# Altium PCB 16515.PcbDoc (part 2 of 2)
Units mil, origin at the board's own origin, x right, y up, seen from the top; angles counter-clockwise.
Board outline 3543.31 x 2500 mil, 6 copper layers (Top Layer, Layer 1, SIG_1, SIG_2, Layer 2, Bottom Layer), stack 56.912 mil thick; 73 components, 58 nets, 263 pads, 207 vias.
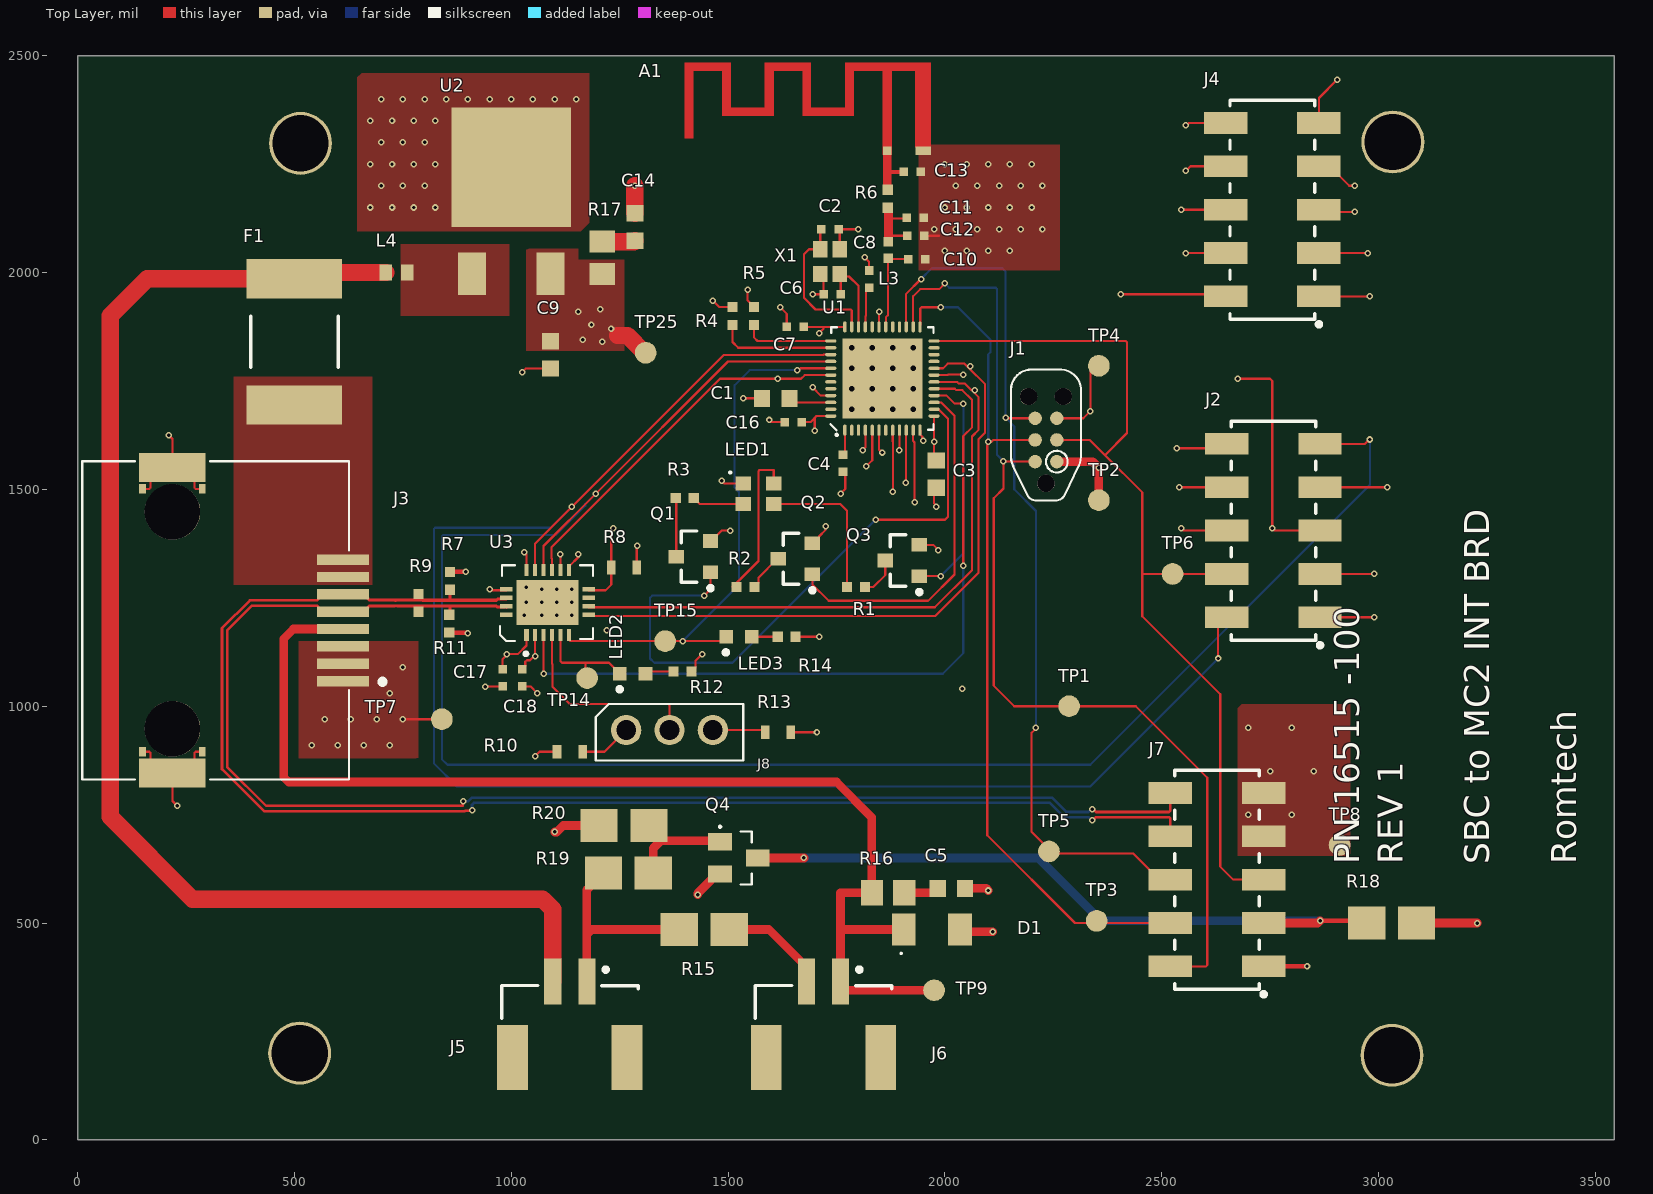
[diagram p0: Top Layer view]

## Part data (continued)
R7: library part Res, "YAGEO - RC0402FR-07620RL - Surface Mount Chip Resistor, Thick Film, RC Series, 620 ohm, 63 mW, 1%, 50 V, 0402 [1005 Metric] RoHS Compliant: Yes", Case Code (Imperial)=0402, Case Code (Metric)=1005, Manufacturer 1=Yageo, Manufacturer Part Number 1=RC0402FR-07620RL, Max Operating Temperature=155°C, Max Power Dissipation=63mW, Min Operating Temperature=-55°C, Package Quantity=1, Resistance=620, Resistance Tolerance=1%, Resistor Type="Thick Film", Supplier Part Number 1=311-620LRTR-ND, Temperature Coefficient=100ppm/°C, Voltage Rating=50V, Case/Package=0402, Category="Chip SMD Resistors", ComponentLink1Description=https://datasheet.ciiva.com/16867/pyu-rc0402-51-rohs-l-6-16867429.pdf?src-supplier=Avnet+Europe, ComponentLink1URL=https://datasheet.ciiva.com/16867/pyu-rc0402-51-rohs-l-6-16867429.pdf?src-supplier=Avnet+Europe, ComponentLink2Description=https://datasheet.ciiva.com/2453/pyu-r-int-thick-7-2453670.pdf?src-supplier=Digi-Key, ComponentLink2URL=https://datasheet.ciiva.com/2453/pyu-r-int-thick-7-2453670.pdf?src-supplier=Digi-Key, ComponentLink3Description=https://datasheet.ciiva.com/17066/pyu-rc0402-51-rohs-l-6-r-17066550.pdf?src-supplier=Future+Electronics, ComponentLink3URL=https://datasheet.ciiva.com/17066/pyu-rc0402-51-rohs-l-6-r-17066550.pdf?src-supplier=Future+Electronics, ComponentLink4Description=https://datasheet.ciiva.com/2453/pyu-r-int-thick-7-2453672.pdf?src-supplier=Digi-Key, ComponentLink4URL=https://datasheet.ciiva.com/2453/pyu-r-int-thick-7-2453672.pdf?src-supplier=Digi-Key, ComponentLink5Description=https://datasheet.ciiva.com/7850/1018594-7850062.pdf?src-supplier=Element14, ComponentLink5URL=https://datasheet.ciiva.com/7850/1018594-7850062.pdf?src-supplier=Element14, ComponentLink6Description=https://datasheet.ciiva.com/7850/1018594-7850063.pdf?src-supplier=Element14, ComponentLink6URL=https://datasheet.ciiva.com/7850/1018594-7850063.pdf?src-supplier=Element14, ComponentLink7Description=https://datasheet.ciiva.com/8885/pyu-rc0402-51-rohs-l-6-8885125.pdf?src-supplier=Avnet, ComponentLink7URL=https://datasheet.ciiva.com/8885/pyu-rc0402-51-rohs-l-6-8885125.pdf?src-supplier=Avnet, ComponentLink8Description=https://datasheet.ciiva.com/28388/pyu-rc0402-51-rohs-l-6-28388966.pdf?src-supplier=Avnet+Europe, ComponentLink8URL=https://datasheet.ciiva.com/28388/pyu-rc0402-51-rohs-l-6-28388966.pdf?src-supplier=Avnet+Europe, ComponentLink9Description=https://datasheet.ciiva.com/2453/pyu-r-int-thick-7-2453671.pdf?src-supplier=Digi-Key, ComponentLink9URL=https://datasheet.ciiva.com/2453/pyu-r-int-thick-7-2453671.pdf?src-supplier=Digi-Key, Construction=Rectangular, Contact Plating=Tin,Matte, Depth=0.5mm, Features="Moisture Resistant", Height=0.016inch, Lead Free="Lead Free", Length=1mm, Military Standard=Not, Number of Terminations=2, Packaging="Tape and Reel", Power Rating=63mW, Pricing 1="10000=0.00178, 30000=0.00156, 50000=0.00143, 100000=0.00140 (USD)", REACH SVHC=Unknown, RoHS=Yes, RoHS Compliant=Yes, Series=RC, Size Code=0402, Stock 1=180000, Supplier 1=Digi-Key, Termination=SMD/SMT, Tolerance=1%, Voltage Rating (DC)=50V, Width=0.5mm
R8 R10 R13: library part Res, "RES SMD 10K OHM 1% 1/4W 0603", Manufacturer 1="Panasonic Electronic Components", Manufacturer Part Number 1=ERJ-PA3F1002V
R9: library part Res, "Res Thick Film 0402 110 Ohm 1% 0.063W(1/16W) ±100ppm/C Pad SMD Automotive T/R", Case Code (Imperial)=0402, Case Code (Metric)=1005, Manufacturer 1="Stackpole Electronics", Manufacturer Part Number 1=RMCF0402FT110R, Max Operating Temperature=155°C, Max Power Dissipation=63mW, Min Operating Temperature=-55°C, Package Quantity=1, Resistor Type="Thick Film", Supplier Part Number 1=RMCF0402FT110RTR-ND, Temperature Coefficient=100ppm/°C, Tolerance=1%, Case/Package=0402, Category="Chip SMD Resistors", ComponentLink1Description=https://www.seielect.com/Catalog/SEI-RMCF_RMCP.pdf?src-supplier=Avnet, ComponentLink1URL=https://www.seielect.com/Catalog/SEI-RMCF_RMCP.pdf?src-supplier=Avnet, ComponentLink2Description=https://www.seielect.com/Catalog/SEI-RMCF_RMCP.pdf?src-supplier=Digi-Key, ComponentLink2URL=https://www.seielect.com/Catalog/SEI-RMCF_RMCP.pdf?src-supplier=Digi-Key, ComponentLink3Description=https://www.seielect.com/catalog/SEI-Packaging.pdf?src-supplier=Digi-Key, ComponentLink3URL=https://www.seielect.com/catalog/SEI-Packaging.pdf?src-supplier=Digi-Key, Contact Plating=Tin,Matte, Features="Automotive AEC-Q200", Height=0.016inch, Lead Free="Lead Free", Length=0.039inch, Mount="Surface Mount", Number of Terminations=2, Packaging="Tape and Reel", Pricing 1="10000=0.00163, 30000=0.00144, 50000=0.00132, 100000=0.00129 (USD)", Resistance=110R, RoHS=Yes, RoHS Compliant=Yes, Series=RMCF, Stock 1=90000, Supplier 1=Digi-Key, Width=0.02inch
R11: library part Res, "YAGEO - RC0402FR-07620RL - Surface Mount Chip Resistor, Thick Film, RC Series, 620 ohm, 63 mW, 1%, 50 V, 0402 [1005 Metric] RoHS Compliant: Yes", Case Code (Imperial)=0402, Case Code (Metric)=1005, Manufacturer 1=Yageo, Manufacturer Part Number 1=RC0402FR-07620RL, Max Operating Temperature=155°C, Max Power Dissipation=63mW, Min Operating Temperature=-55°C, Package Quantity=1, Resistance Tolerance=1%, Resistor Type="Thick Film", Supplier Part Number 1=311-620LRTR-ND, Temperature Coefficient=100ppm/°C, Voltage Rating=50V, Case/Package=0402, Category="Chip SMD Resistors", ComponentLink1Description=https://datasheet.ciiva.com/16867/pyu-rc0402-51-rohs-l-6-16867429.pdf?src-supplier=Avnet+Europe, ComponentLink1URL=https://datasheet.ciiva.com/16867/pyu-rc0402-51-rohs-l-6-16867429.pdf?src-supplier=Avnet+Europe, ComponentLink2Description=https://datasheet.ciiva.com/2453/pyu-r-int-thick-7-2453670.pdf?src-supplier=Digi-Key, ComponentLink2URL=https://datasheet.ciiva.com/2453/pyu-r-int-thick-7-2453670.pdf?src-supplier=Digi-Key, ComponentLink3Description=https://datasheet.ciiva.com/17066/pyu-rc0402-51-rohs-l-6-r-17066550.pdf?src-supplier=Future+Electronics, ComponentLink3URL=https://datasheet.ciiva.com/17066/pyu-rc0402-51-rohs-l-6-r-17066550.pdf?src-supplier=Future+Electronics, ComponentLink4Description=https://datasheet.ciiva.com/2453/pyu-r-int-thick-7-2453672.pdf?src-supplier=Digi-Key, ComponentLink4URL=https://datasheet.ciiva.com/2453/pyu-r-int-thick-7-2453672.pdf?src-supplier=Digi-Key, ComponentLink5Description=https://datasheet.ciiva.com/7850/1018594-7850062.pdf?src-supplier=Element14, ComponentLink5URL=https://datasheet.ciiva.com/7850/1018594-7850062.pdf?src-supplier=Element14, ComponentLink6Description=https://datasheet.ciiva.com/7850/1018594-7850063.pdf?src-supplier=Element14, ComponentLink6URL=https://datasheet.ciiva.com/7850/1018594-7850063.pdf?src-supplier=Element14, ComponentLink7Description=https://datasheet.ciiva.com/8885/pyu-rc0402-51-rohs-l-6-8885125.pdf?src-supplier=Avnet, ComponentLink7URL=https://datasheet.ciiva.com/8885/pyu-rc0402-51-rohs-l-6-8885125.pdf?src-supplier=Avnet, ComponentLink8Description=https://datasheet.ciiva.com/28388/pyu-rc0402-51-rohs-l-6-28388966.pdf?src-supplier=Avnet+Europe, ComponentLink8URL=https://datasheet.ciiva.com/28388/pyu-rc0402-51-rohs-l-6-28388966.pdf?src-supplier=Avnet+Europe, ComponentLink9Description=https://datasheet.ciiva.com/2453/pyu-r-int-thick-7-2453671.pdf?src-supplier=Digi-Key, ComponentLink9URL=https://datasheet.ciiva.com/2453/pyu-r-int-thick-7-2453671.pdf?src-supplier=Digi-Key, Construction=Rectangular, Contact Plating=Tin,Matte, Depth=0.5mm, Features="Moisture Resistant", Height=0.016inch, Lead Free="Lead Free", Length=1mm, Military Standard=Not, Number of Terminations=2, Packaging="Tape and Reel", Power Rating=63mW, Pricing 1="10000=0.00178, 30000=0.00156, 50000=0.00143, 100000=0.00140 (USD)", REACH SVHC=Unknown, Resistance=620R, RoHS=Yes, RoHS Compliant=Yes, Series=RC, Size Code=0402, Stock 1=180000, Supplier 1=Digi-Key, Termination=SMD/SMT, Tolerance=1%, Voltage Rating (DC)=50V, Width=0.5mm
R15 R18 R19 R20: library part Res, "Resistor", Manufacturer 1="Stackpole Electronics", Manufacturer Part Number 1=RMCF1206FT2K00, Supplier Part Number 1=RMCF1206FT2K00CT-ND, Supplier 1=Digi-Key
R16 R17: library part Res, "Resistor", Manufacturer 1=Panasonic, Manufacturer Part Number 1=ERJ-P06F1001V, Supplier Part Number 1=P16058CT-ND, ComponentLink1Description="New link", Supplier 1=Digi-Key
TP1 TP2 TP3 TP4 TP5 TP6 TP7 TP8 TP9 TP14 TP15 TP25: library part Test, "Test point"
U1: "IC RF TXRX+MCU BLUETOOTH 48QFN", Case/Package=QFN, Current - Receiving=10.4mA, Current - Transmitting=15.2mA, Frequency=2.4GHz, Manufacturer 1="Nordic Semiconductor", Max Operating Temperature=85°C, Min Operating Temperature=-40°C, Supplier Part Number 1=1490-1052-2-ND, ComponentLink1Description=http://www.mouser.com/ds/2/297/nRF52832%20Product%20Brief%20v1.2-890472.pdf?src-supplier=Mouser, ComponentLink1URL=http://www.mouser.com/ds/2/297/nRF52832%20Product%20Brief%20v1.2-890472.pdf?src-supplier=Mouser, ComponentLink2Description=https://www.nordicsemi.com/eng/Products/Bluetooth-Smart-Bluetooth-low-energy/nRF52832?src-supplier=Avnet+Asia, ComponentLink2URL=https://www.nordicsemi.com/eng/Products/Bluetooth-Smart-Bluetooth-low-energy/nRF52832?src-supplier=Avnet+Asia, ComponentLink3Description=http://infocenter.nordicsemi.com/pdf/nRF52832_PB_v1.7.pdf?src-supplier=Digi-Key, ComponentLink3URL=http://infocenter.nordicsemi.com/pdf/nRF52832_PB_v1.7.pdf?src-supplier=Digi-Key, ComponentLink4Description=http://infocenter.nordicsemi.com/pdf/nRF52832_PS_v1.4.pdf?src-supplier=Digi-Key, ComponentLink4URL=http://infocenter.nordicsemi.com/pdf/nRF52832_PS_v1.4.pdf?src-supplier=Digi-Key, Core Architecture=ARM, Data Bus Width=32b, Data Rate=2Mbps, Interface=I2C,SPI,UART, Lead Free="Lead Free", Manufacturer Part Number 1=NRF52832-QFAA-R, Max Frequency=2.4GHz, Memory Size=64KB, Memory Type=FLASH, Mount="Surface Mount", Number of GPIO=32, Number of Pins=48, Packaging="Tape and Reel", Pricing 1="3000=2.59350 (USD)", RAM Size=64Kb, RoHS=Yes, Sensitivity=-96dBm, Stock 1=60000, Supplier 1=Digi-Key
U2: library part Component_1, "Linear Voltage Regulator IC Positive Fixed 1 Output 1A TO-252", Manufacturer 1="Rohm Semiconductor", Manufacturer Partnumber 1=BA033CC0FP-E2
U3: "I2C Slave Device Extender Over Rugged Differential Link 20-QFN", Manufacturer 1="Analog Devices", Supplier Part Number 1=LTC4331CUFD#PBF-ND, Manufacturer Part Number 1=LTC4331CUFD#PBF, Pricing 1="1=6.84000, 10=6.17600, 25=5.88880, 100=4.88340, 250=4.45252, 500=4.16528, 1000=3.79400 (USD)", RoHS=Yes, RoHS Compliant=Yes, Stock 1=282, Supplier 1=Digi-Key
X1: library part FA-12832.0000MF10Z-AJ3, "32MHz ±10ppm Crystal 8pF 60 Ohms 4-SMD, No Lead", Case/Package=SMD/SMT, ESR (Equivalent Series Resistance)=60R, Frequency Stability=10ppm, Load Capacitance=8pF, Manufacturer 1=Epson, Max Operating Temperature=75°C, Min Operating Temperature=-20°C, Supplier Part Number 1=SER4233TR-ND, ComponentLink1Description=https://www5.epsondevice.com/en/information/support/pdf/june_2018_psc_masterbook.pdf?src-supplier=Digi-Key, ComponentLink1URL=https://www5.epsondevice.com/en/information/support/pdf/june_2018_psc_masterbook.pdf?src-supplier=Digi-Key, ComponentLink2Description=https://support.epson.biz/td/api/doc_check.php?dl=brief_FA-128_en.pdf&src-supplier=Digi-Key, ComponentLink2URL=https://support.epson.biz/td/api/doc_check.php?dl=brief_FA-128_en.pdf&src-supplier=Digi-Key, Frequency=32MHz, Frequency Tolerance=10ppm, Height=0.02inch, Lead Free="Lead Free", Length=0.079inch, Manufacturer Part Number 1=FA-12832.0000MF10Z-AJ3, Mount="Surface Mount", Packaging="Tape and Reel", Pricing 1="250=0.36000, 500=0.34200, 750=0.31500, 1250=0.28800, 2500=0.27000, 6250=0.26100, 12500=0.25200 (USD)", RoHS=Yes, Stock 1=6250, Supplier 1=Digi-Key, Width=0.063inch

## Free pads (board coordinates)
  round 145 hole 129.92: 1(512,200) 1(514,2298) 1(3031,195) 1(3033,2301)

## Via types
v1: diameter 15, hole 8, Top Layer to Bottom Layer, 191 vias
v2: diameter 25.98, hole 12.99, Top Layer to Bottom Layer, 16 vias

## Nets (pads, with @x,y where several pads share a name; then routed paths per layer and width w, separated by ;. In a path a pad name is that pad's centre, name@x,y a point inside that pad or via, vN(x,y) a via of type N, cw(c..) or ccw(c..) an arc to the next point about the centre after c; other vN are vias at no path point)
3.3V: C3.1 C7.1 C9.2 C16.1 C17.2 C18.2 J1.1 J4.1 J4.3 J7.1 LED1.1 R7.2 R8.2 R10.1 R12.1 R14.1 R17.2 R18.1 TP2.1 TP25.1 U1.13 U1.36 U1.48 U2.2 U3.1 U3.2 U3.17 | length 1592.1
  Top Layer w5: v1(950,1270) 952.6,1267.4 U3.17@988.7,1267.4 ; C17.2 980,1108.79 990,1118.79 v1(990,1120) 1015,1120 1035,1140 U3.1@1035,1162 ; C18.2 1032.34,1092.34 1032.34,1102.34 1036.02,1106.02 1043.31,1106.02 1052.29,1115 v1(1055,1115) 1054.84,1115.16 1054.84,1161.86 U3.2@1054.7,1162 ; v1(1055,885) 1065,895 R10.1 ; v1(1290,1370) 1289.53,1369.53 R8.2 R8.2@1294.21,1315.31 ; R12.1 1424.98,1089.31 1424.98,1104.98 v1(1440,1120) ; v1(1485,1520) 1491.38,1513.62 LED1.1 ; R14.1 v1(1710,1160) ; C16.1 1690,1655 1700,1665 ; C7.1@1674.68,1874.72 1720,1874.72 ; v1(1700,1635) 1700,1665 ; v1(1710,1860) 1710,1860.58 1720,1870.58 1720,1874.72 ; U1.48 1704.02,1669.02 1700,1665 ; U1.36 1720,1874.72 ; C3.1@1975,1576.5 v1(1975,1610) U1.13 ; J4.1 v1(2980,1945) ; J4.3 v1(2975,2045)
  Top Layer w10: R7.2 894.67,1309.67 v1(895,1310) ; J7.1 v1(2835,400)
  Top Layer w20: J1.1 2341,1564 v1(2355,1550) TP2.1 ; R18.1 v1(3227.48,500)
  Top Layer w40: 1245,1855 1267.29,1855 1307.29,1815 TP25.1
  other v1: 1210,1840 1165,1845 1230,1870 1185,1880 1155,1910 1205,1915
24V_OUT_TABLET: F1.2 J5.2 L4.1 | length 3107.8
  Top Layer w40: L4.1 514.33,2000 F1.2 160.67,1985.67 75,1900 75,745 265,555 1072.2,555 1095.63,531.57 J5.2
/ALERT: R8.1 U1.12 U3.10 | length 1297
  Top Layer w5: U3.10@1178.66,1267.4 1217.6,1267.4 1230.47,1280.27 R8.1 1230.47,1405.47 v1(1235,1410) ; U1.12 1943.07,1635.99 1943.07,1626.35 1947.78,1621.64 1947.78,1613.68 v1(1949.69,1611.77)
  SIG_1 w5: v1(1235,1410) 1263.28,1410 1565,1711.72 1565,1761.21 1613.79,1810 1700,1810 1735,1775 1735,1622.93 1737.93,1620 1918.28,1620 1926.51,1611.77 v1(1949.69,1611.77)
AUX_TP0: J4.2 U1.9 | length 1003.1
  Top Layer w5: v1(1895,1590) 1895.28,1590.28 U1.9 ; v1(2405,1950) 2642.52,1950 J4.2
  SIG_2 w5: v1(1895,1590) 1931.77,1626.77 2066.77,1626.77 2130,1690 2130,1780 2300,1950 v1(2405,1950)
AUX_TP1: J4.4 U1.10 | length 1516.3
  Top Layer w5: v1(1910,1515) 1910,1624.62 1910.47,1625.1 1910.47,1635.99 U1.10 ; v1(2555,2045) J4.4
  SIG_2 w5: v1(1910,1515) 1910,1466.21 1976.21,1400 2445,1400 2510,1465 2510,2000 v1(2555,2045)
AUX_TP2: J4.6 U1.11 | length 1569.7
  Top Layer w5: U1.11 1926.77,1611.51 1930,1608.28 v1(1930,1470) ; v1(2545,2145) J4.6
  SIG_2 w5: v1(1930,1470) 1930,1467.43 1973.03,1424.39 2448.18,1424.39 2459.39,1435.61 2459.39,2059.39 v1(2545,2145)
AUX_TP3: J4.8 U1.6 | length 1184.8
  Top Layer w5: U1.6 1848.03,1591.97 v1(1855,1585) ; v1(2555,2235) 2556.21,2235 2566.21,2245 J4.8
  SIG_2 w5: v1(1855,1585) 1906.77,1636.77 2056.77,1636.77 2110,1690 2110,1800 2545,2235 v1(2555,2235)
AUX_TP4: J4.10 U1.4 | length 1393.1
  Top Layer w5: v1(1810,1590) 1816.54,1596.54 U1.4 ; v1(2555,2340) 2557.71,2340 2562.71,2345 J4.10
  SIG_1 w5: v1(1810,1590) 1837.19,1562.81 2019.88,1562.81 2022.81,1565.74 2022.81,1857.81 2505,2340 v1(2555,2340)
AUX_TP5: J2.10 U1.5 | length 1070.6
  Top Layer w5: v1(1818.36,1553.36) 1832.28,1567.28 U1.5 ; v1(2535,1595) 2640.04,1595 J2.10
  SIG_1 w5: v1(1818.36,1553.36) 1821.06,1553.36 1826.61,1547.81 2073.54,1547.81 2191.35,1430 2415,1430 2535,1550 v1(2535,1595)
DEC1: C4.1 U1.1 | length 58.6
  Top Layer w5: C4.1 1769.29,1583.98 U1.1
DEC3: C8.1 U1.33 | length 94.1
  Top Layer w5: U1.33 1816.54,1898.46 1817.66,1899.59 1817.66,1957.97 C8.1
E-STP_STATUS: J4.5 J7.3 Q4.3 R18.2 U1.8 | length 4989.4
  Top Layer w5: U1.8 1879.53,1610.47 1880,1610 v1(1880,1495) ; J4.5 2867.48,2140 v1(2945,2140) ; R18.2@2967.52,505 R18.2
  Top Layer w10: v1(2865,505) R18.2@2967.52,505
  Top Layer w20: Q4.3 v1(1675,650) ; J7.3 2860,500 v1(2865,505)
  SIG_2 w5: v1(1675,650) 1880,855 1880,1475 ; v1(1880,1495) 1880,1475 ; v1(2945,2140) 3090,2140 3215,2015 3215,1560 3100,1445 2545,1445 2485,1385 2346.25,1385 2330.25,1369 2124.75,1369 2108.75,1385 1970,1385 1880,1475
  Bottom Layer w20: v1(1675,650) 2215,650 2360,505 v1(2865,505)
GND: A1.GND C1.1 C2.2 C3.2 C4.2 C5.2 C6.2 C7.2 C8.2 C9.1 C10.1 C11.2 C12.2 C13.2 C14.2 C16.2 C17.1 C18.1 D1.1 J1.5 J3.1 J3.2 J3.3 J3.SH1 J3.SH1_1 J3.SH1_2 J3.SH2 J3.SH2_1 J3.SH2_2 J4.7 J4.9 J7.7 J7.9 Q1.2 Q2.2 Q3.2 Q4.2 R4.2 R5.2 R11.1 R13.1 R20.2 TP4.1 TP7.1 TP8.1 U1.31 U1.45 U1.49 U2.3 U3.11 U3.12 U3.16 U3.EP X1.2 X1.4 | length 2611.7
  Top Layer w5: J3.SH2_2 165.18,894.85 168.11,891.92 168.11,876.74 199.11,845.74 J3.SH2 ; J3.SH1_2 165.18,1501.15 168.11,1504.08 168.11,1519.26 199.11,1550.26 J3.SH1 ; v1(210,1625) 218.7,1616.3 J3.SH1 ; v1(230,770) 218.7,781.3 J3.SH2 ; J3.SH2_1 272.22,894.85 269.3,891.92 269.3,876.74 238.3,845.74 J3.SH2 ; J3.SH1_1 272.22,1501.15 269.3,1504.08 269.3,1519.26 238.3,1550.26 J3.SH1 ; 760,970 TP7.1 ; v1(940,1045) 940.63,1045.63 C17.1 ; C18.1 1044.37,1045.63 v1(1060,1030) ; v1(1025,1770) 1033.5,1778.5 C9.1 ; v1(1030,1355) 1035,1350 U3.16@1035,1313.58 ; v1(1112.6,1350) 1113.8,1348.8 U3.12@1113.8,1313.58 ; U3.11@1133.5,1313.58 1133.5,1322.58 1155,1344.08 v1(1155,1350) ; Q1.2 1461.34,1381.02 1485.31,1405 v1(1505,1405) ; v1(1465,1935) 1479.33,1920.67 R4.2 ; v1(1535,1710) C1.1 ; v1(1545,1960) 1545,1935.67 R5.2 ; v1(1595,1660) 1595,1657.93 1597.93,1655 C16.2 ; v1(1620,1920) 1635.31,1904.69 C7.2 ; R13.1 v1(1705,940) ; Q2.2 1696.34,1376.02 1709.59,1389.27 1709.59,1391.24 1725,1406.65 v1(1725,1415) ; v1(1695,1735) 1713.74,1716.26 U1.45 ; v1(1695,1950) C6.2 1720.31,1988.5 X1.4 ; X1.2 1757.64,2097.05 C2.2 v1(1800,2100) ; v1(1760,1489.69) 1760,1490.9 1770,1500.9 C4.2@1770,1540.31 ; v1(1815,2035) 1825,2025 C8.2 ; U1.31 1848.03,1909.25 v1(1848.78,1910) ; Q3.2 1972.95,1372.05 v1(1985,1360) ; C12.2 1986.13,2085 ; C3.2@1975,1513.5 1975,1467.71 1980,1462.71 v1(1980,1460) ; J1.5 2319,1664 v1(2335,1680) 2335.63,1680.63 2335.63,1779.37 TP4.1@2336.25,1780 ; J4.7 2887.48,2245 2932.48,2200 v1(2945,2200) ; J4.9 2862.48,2402.48 v1(2905,2445)
  Top Layer w10: R11.1 896.99,1169.66 898.65,1168 v1(900,1168)
  Top Layer w20: v1(1100,710) 1105,710 1120,725 R20.2 ; v1(1430,565) 1430,568.78 1473.82,612.6 Q4.2 ; D1.1 2039.96,480 v1(2110,480) ; C5.2 2095,580 v1(2100,575)
  Top Layer w40: C14.2 v1(1285,2200)
  other v1: 2700,750 2800,750 2750,850 2850,850 540,910 600,910 660,910 720,910 2700,950 2800,950 570,970 630,970 690,970 750,970 720,1030 750,1090 1220,1175 1030,1210 1070,1210 1105,1210 1140,1210 1035,1240 1070,1240 1105,1240 1140,1240 1070,1270 1105,1270 1140,1270 1035.06,1273.76 2000,2050 2050,2050 2100,2050 2150,2050 1975,2100 2025,2100 2075,2100 2125,2100 2175,2100 2225,2100 675,2150 725,2150 775,2150 825,2150 2000,2150 2050,2150 2100,2150 2150,2150 2200,2150 700,2200 750,2200 800,2200 2025,2200 2075,2200 2125,2200 2175,2200 2225,2200 675,2250 725,2250 775,2250 825,2250 2000,2250 2050,2250 2100,2250 2150,2250 2200,2250 700,2300 750,2300 800,2300 675,2350 725,2350 775,2350 825,2350 700,2400 750,2400 800,2400 850,2400 900,2400 950,2400 1000,2400 1050,2400 1100,2400 1150,2400
  other v2: 1785.04,1684.76 1832.28,1684.76 1879.53,1684.76 1926.77,1684.76 1785.04,1732.01 1832.28,1732.01 1879.53,1732.01 1926.77,1732.01 1785.04,1779.25 1832.28,1779.25 1879.53,1779.25 1926.77,1779.25 1785.04,1826.5 1832.28,1826.5 1879.53,1826.5 1926.77,1826.5
I2C_EN: J2.7 U1.17 U3.3 | length 3377.6
  Top Layer w5: U3.3@1074.4,1162 1074.4,1075.6 v1(1075,1075) ; U1.17 2022.68,1732.01 2025.78,1728.9 2039.97,1728.9 2062.81,1706.06 2062.81,1643.52 2042.38,1623.09 v1(2042.38,1324.09) ; J2.7 v1(3020,1505)
  SIG_1 w5: v1(2040,1040) 2296.15,1040 2386.15,1130 2645,1130 v1(3020,1505)
  SIG_2 w5: v1(2040,1040) 2041.19,1041.19 2041.19,1322.9 v1(2042.38,1324.09)
  Bottom Layer w5: v1(1075,1075) 1995,1075 2042.38,1122.38 v1(2042.38,1324.09)
I2C_EN_ACC: J2.3 U1.19 | length 1734.1
  Top Layer w5: U1.19 2005.8,1763.5 2007.5,1765.21 2041.51,1765.21 v1(2042.81,1763.9) ; J2.3 v1(2990,1305)
  SIG_1 w5: v1(2042.81,1763.9) 2044.22,1762.5 2275.41,1762.5 2276.41,1761.5 2494,1761.5 2537.5,1805 3010,1805 3065,1750 3065,1380 v1(2990,1305)
I2C_RDY: J2.6 LED3.2 TP15.1 U1.41 U3.6 | length 2970.6
  Top Layer w5: U3.6@1133.5,1162 1133.5,1153 1136.5,1150 1280,1150 v1(1395,1150) 1485.47,1150 LED3.2 ; v1(1660,1775) 1662.71,1775 1667.71,1780 1668.45,1779.25 U1.41 ; v1(2545,1410) 2550,1405 J2.6
  SIG_1 w5: v1(1660,1775) 1600,1775 1595,1770 1595,1688.28 1615,1668.28 1615,1440 1950,1105 2132.43,1105 2437.43,1410 v1(2545,1410)
  Bottom Layer w5: v1(1395,1150) 1525,1280 1525,1494.14 1515,1504.14 1515,1740 1550,1775 v1(1660,1775)
I2C_SCL: J2.1 U1.20 U3.7 | length 3316.7
  Top Layer w5: U3.7@1178.66,1208.3 1978.3,1208.3 2077.38,1307.38 2077.38,1615.66 2092.81,1631.1 2092.81,1742.19 v1@2055,1780 ; U1.20 1995.97,1779.25 2006.72,1790 2045,1790 v1@2055,1780 ; v1(2058.43,1783.43) v1@2055,1780 ; J2.1 v1(2990,1205)
  SIG_1 w5: v1(2058.43,1783.43) 2095,1820 3030,1820 3085,1765 3085,1300 v1(2990,1205)
I2C_SDA: J2.5 U1.18 U3.8 | length 2593.3
  Top Layer w5: U3.8@1178.66,1228 1976.79,1228 2062.38,1313.59 2062.38,1621.87 2077.81,1637.31 2077.81,1712.27 2046.18,1743.9 2031.99,1743.9 2028.14,1747.76 U1.18 ; v1(2675,1755) 2750,1755 2755,1750 v1(2755,1410) 2760,1405 J2.5
  SIG_1 w5: v1(2068.58,1728.58) 2086.5,1746.5 2500.21,1746.5 2508.71,1755 v1(2675,1755)
L_BLUE: Q2.1 U1.15 | length 817.7
  Top Layer w5: Q2.1 1694.37,1280.73 1732.1,1243 1961.28,1243 2022.19,1303.9 2022.19,1669.68 1991.36,1700.51 U1.15
L_GRN: Q3.1 U1.16 | length 546.6
  Top Layer w5: Q3.1@1941.02,1298.98 1940,1298.98 Q3.1 v1(1990,1300) ; U1.16 2003.89,1716.26 2022.38,1697.78 v1(2042.81,1697.78)
  Bottom Layer w5: v1(1990,1300) 2042.81,1352.81 v1(2042.81,1697.78)
L_RED: Q1.1 U1.14 | length 1424.9
  Top Layer w5: v1(1445,1255) 1459.37,1269.37 Q1.1 ; v1(1840,1430) 2000,1430 2007.19,1437.19 2007.19,1662.81 1985.24,1684.76 U1.14
  Bottom Layer w5: v1(1445,1255) 1325,1255 1320,1250 1320,1110 1330,1100 1510,1100 v1(1840,1430)
NetA1_ANT: A1.ANT C13.1 R6.2 | length 130.9
  Top Layer w10: R6.2@1867,2191.67 R6.2 ; 1867,2236.33 1871.33,2232 C13.1
  Top Layer w20: R6.2@1867,2191.67 1867,2236.33 A1.ANT
NetC1_2: C1.2 U1.46 | length 99.2
  Top Layer w5: C1.2 1650.98,1700.51 U1.46
NetC5_1: C5.1 R16.1 | length 81.8
  Top Layer w20: R16.1 1974.49,570 1983.5,579.02 C5.1
NetC10_2: C10.2 L3.1 U1.30 | length 195.7
  Top Layer w5: U1.30 1863.78,1896.72 1868.78,1901.72 1868.78,2030.08 L3.1@1870,2031.3 ; L3.1@1869.78,2031 C10.2@1906.31,2031
NetC11_1: C11.1 C12.1 L3.2 R6.1 | length 163.8
  Top Layer w5: L3.2@1866,2068.4 L3.2@1871,2073.4 ; 1870,2090 1875,2085 C12.1@1905.32,2085 ; 1870,2125 1905.32,2125 C11.1@1910.32,2130
  Top Layer w20: L3.2@1870,2072.4 1870,2090 1870,2125 R6.1@1870,2149.33
NetC14_1: C14.1 R17.1 | length 75.9
  Top Layer w40: R17.1 1282.9,2071.4 C14.1
NetF1_1: F1.1 J3.7 J3.8
NetJ5_1: J5.1 R15.2 R19.2 | length 486.6
  Top Layer w20: J5.1 1174.37,473.28 ; R19.2 1207.6,615 1179.61,587.01 1179.61,582.09 1174.37,576.85 1174.37,473.28 ; R15.2 1186.09,485 1174.37,473.28
NetJ6_2: J6.2 R15.1 | length 247.4
  Top Layer w20: R15.1 1594.13,485 1680.63,398.5 J6.2
NetJ8_1: J8.1 R10.2 | length 121.2
  Top Layer w5: R10.2 1215,895 J8.1
NetJ8_3: J8.3 R13.2 | length 122.5
  Top Layer w5: J8.3 1580.47,945 R13.2
NetL4_2: L4.2 U2.1
NetLED1_2: LED1.2 R3.2 | length 119.5
  Top Layer w5: R3.2 1434.29,1466.38 LED1.2
NetLED1_3: LED1.3 R1.2 | length 351.1
  Top Layer w5: LED1.3 1758.62,1466.38 1774.33,1450.67 R1.2
NetLED1_4: LED1.4 R2.2 | length 368.7
  Top Layer w5: R2.2 1510,1275 1570,1335 1570,1542.07 1572.5,1544.57 1605.43,1544.57 LED1.4
NetLED2_1: LED2.1 R12.2 | length 66.9
  Top Layer w5: LED2.1 1314.53,1080 R12.2
NetLED2_2: LED2.2 TP14.1 U3.5 | length 243.9
  Top Layer w5: U3.5@1113.8,1162 1113.8,1102.93 1116.73,1100 1171.1,1100 ; TP14.1 1171.1,1068.9 1171.1,1100 ; LED2.2 1225.47,1100 1171.1,1100
NetLED3_1: LED3.1 R14.2 | length 60.5
  Top Layer w5: LED3.1 R14.2@1615,1160
NetQ1_3: Q1.3 R3.1 | length 135.5
  Top Layer w5: R3.1 1380.63,1478.7 Q1.3
NetQ2_3: Q2.3 R2.1 | length 88.9
  Top Layer w5: R2.1 1569.98,1284.31 1569.98,1296.32 1613.66,1340 Q2.3
NetQ3_3: Q3.3 R1.1 | length 91.7
  Top Layer w5: R1.1 1835,1275 1862.28,1302.28 Q3.3
NetQ4_1: Q4.1 R19.1 R20.1 | length 220
  Top Layer w20: R19.1 1327.48,672.48 1345,690 1479.09,690 Q4.1
NetR4_1: R4.1 U1.38 | length 271.7
  Top Layer w5: R4.1 1510,1840 1523.5,1826.5 U1.38
NetR5_1: R5.1 U1.37 | length 209.4
  Top Layer w5: R5.1 1560,1850 1567.76,1842.24 U1.37
nRF_RESET: J1.3 J2.4 J7.5 TP6.1 U1.24 | length 2219.8
  Top Layer w5: U1.24 2417.07,1842.24 2420,1839.32 2420,1630 2369,1579 ; J1.3 2334,1614 2369,1579 ; J2.4 TP6.1 2455,1305 ; J7.5 2665,600 2635,630 2635,1027.5 2455,1207.5 2455,1305 ; 2369,1579 2455,1493 2455,1305
PC_N: J3.5 J7.10 R9.1 R11.2 U3.19 | length 3304.2
  Top Layer w6: J3.5 564.37,1218 555.36,1227.01 555.36,1228.49 551.85,1232 402,1232 345,1175 345,860 435,770 888,770 888,780.02 v1(888.99,781.01) ; 731.65,1231.27 736.62,1231.27 ; v1(2340,762.5) 2342.44,762.5 2348.94,756 2516.52,756 2520.04,759.51 J7.10
  Top Layer w7.45: J3.5 660.43,1218 668.72,1226.28 668.72,1226.91 673.08,1231.27 731.65,1231.27 ; 736.62,1231.27 790.21,1231.27 790.36,1231.12 859,1231.12 ; R11.2 859,1213 859,1231.12 ; U3.19@988.7,1228 988.23,1228.48 968.51,1228.48 965.87,1231.12 859,1231.12
  Bottom Layer w6: v1(888.99,781.01) 901.01,781.01 909,789 2246.95,789 2279.95,756 2331.06,756 2337.56,762.5 v1(2340,762.5)
PC_P: J3.6 J7.8 R7.1 R9.2 U3.18 | length 3350
  Top Layer w6: J3.6 564.37,1258 555.36,1248.99 555.36,1247.51 551.85,1244 397.03,1244 333,1179.97 333,855.03 430.03,758 892.97,758 893.75,758.78 907.77,758.78 v1(909.5,760.5) ; 731.65,1244.73 733.1,1243.27 ; v1(2340,737.5) 2342.44,737.5 2348.94,744 2516.52,744 2520.04,740.49 J7.8
  Top Layer w7.45: J3.6 660.43,1258 668.72,1249.72 668.72,1249.09 673.08,1244.73 731.65,1244.73 795.78,1244.73 795.93,1244.57 859,1244.57 ; R7.1 859,1244.57 ; U3.18@988.7,1247.7 988.23,1247.23 968.51,1247.23 965.87,1244.57 859,1244.57
  Bottom Layer w6: v1(909.5,760.5) 909.5,772.53 913.98,777 2241.97,777 2274.98,744 2331.06,744 2337.56,737.5 v1(2340,737.5)
PS_ON: D1.2 J3.4 J6.1 R16.2 TP9.1 | length 2688.8
  Top Layer w20: J3.4 498,1178 475,1155 475,836.72 486.72,825 1750,825 1831.6,743.4 R16.2 1759.37,570 1759.37,480 ; D1.2 1764.37,485 1759.37,480 ; TP9.1 1769.06,345 1759.37,354.69 J6.1 1759.37,480
R_CTRL: J2.8 U1.42 U3.13 | length 2491.8
  Top Layer w5: U3.13@1094.1,1313.58 1094.1,1340.22 1092.6,1341.72 1092.6,1366.39 1481.21,1755 v1(1615,1755) 1668.28,1755 1676.79,1763.5 U1.42 ; v1(2540,1505) J2.8
  SIG_1 w5: v1(1615,1755) 1645,1725 1645,1431.21 1956.21,1120 2126.21,1120 2511.21,1505 v1(2540,1505)
REM: J8.2 U3.4 | length 462.2
  Top Layer w5: U3.4@1094.1,1162 1094.1,1097.95 1095,1097.05 1095,1045 1135,1005 1362.07,1005 1365,1002.07 J8.2
SPEED1: J2.9 U1.40 U3.14 | length 4442.8
  Top Layer w5: U3.14@1074.4,1313.58 1074.4,1369.4 v1(1195,1490) 1500,1795 1625,1795 U1.40 ; J2.9 2968.79,1605 2978.79,1615 v1(2980,1615)
  Bottom Layer w5: v1(1195,1490) 1170.69,1465.69 1170.69,1462.4 1103.28,1395 842.93,1395 840,1392.07 840,877.93 852.93,865 2335,865 2980,1510 v1(2980,1615)
SPEED2: J2.2 U1.39 U3.15 | length 3859.8
  Top Layer w5: U3.15@1054.7,1313.58 1054.7,1374.7 v1(1140,1460) 1490,1810 1719.71,1810 1720.46,1810.75 U1.39 ; v1(2630,1110) 2630,1184.96 J2.2
  Bottom Layer w5: v1(1140,1460) 1091.54,1411.54 824.47,1411.54 821.54,1408.61 821.54,868.46 875,815 2335,815 v1(2630,1110)
SWCLK_1: J1.4 J7.4 TP3.1 U1.25 | length 1993.3
  Top Layer w5: U1.25@1943.21,1879.54 1943.21,1917.07 1946.14,1920 v1(1990,1920) ; J1.4 2111.71,1614 2107.71,1610 v1(2100,1610) 2098.09,1608.09 2098.09,1602.66 2097.5,1602.07 2097.5,702.5 2300,500 2350,500 J7.4
  Bottom Layer w5: v1(1990,1920) 2030,1920 2105,1845 2105,1816.35 2100,1811.35 v1(2100,1610)
SWDIO_1: J1.2 J7.2 TP1.1 U1.26 | length 2383.9
  Top Layer w5: U1.26 1926.77,1945.56 1942.98,1961.77 1986.77,1961.77 v1(2000,1975) ; J1.2 2136,1564 v1(2135,1565) 2135,1502.13 2112.5,1479.63 2112.5,1047.5 2160,1000 TP1.1 2440,1000 2605,835 2605,402.93 2602.07,400 J7.2
  Bottom Layer w5: v1(2000,1975) 2010,1965 2117.07,1965 2120,1962.07 2120,1580 v1(2135,1565)
SWO_1: J1.6 J7.6 TP5.1 U1.27 | length 2092.6
  Top Layer w5: U1.27@1910,1874.72 1910,1950 v1(1945,1985) ; v1(2140,1665) 2141,1664 J1.6 ; v1(2210,950) 2210,948.79 2200,938.79 2200,710 2250,660 2435.04,660 2495.04,600 J7.6
  Bottom Layer w5: v1(1945,1985) 1970,2010 2132.07,2010 2140,2002.07 v1(2140,1665) 2160,1645 2160,1500 2210,1450 v1(2210,950)
XC1: C6.1 U1.34 X1.1 | length 193.3
  Top Layer w5: X1.1 X1.1@1759.68,1994.41 ; C6.1 X1.1@1759.68,1994.41 ; U1.34 1800.79,1905.79 1800.79,1969.21 1778.94,1991.06 1763.04,1991.06 X1.1@1759.68,1994.41
XC2: C2.1 U1.35 X1.3 | length 349.8
  Top Layer w5: C2.1 1712.36,2097.05 X1.3 1686.47,2053.54 1675,2042.07 1675,1941.72 1701.76,1914.96 1782.11,1914.96 1785.04,1912.03 U1.35
pads on no net: J1.None J3. J5.3 J6.3 U1.2 U1.3 U1.7 U1.21 U1.22 U1.23 U1.28 U1.29 U1.32 U1.43 U1.44 U1.47 U3.9 U3.20

## Polygon pours and split planes (outlines as drawn)
GND on Top Layer "GND_L01_P008" (solid, pour order 8): 655,2460 645,2450 645,2095 1160,2095 1180,2115 1180,2460
GND on Top Layer "GND_L01_P007" (solid, pour order 7): 1938.28,2293.43 1939.85,2295 2265,2295 2265,2005 2035,2005 1940,2005 1940,2291.72
GND on Top Layer "GND_L01_P006" (solid, pour order 6): 2675,655 2920,655 2925,650 2935,660 2935,1005 2685,1005 2675,995 2675,915
GND on Top Layer "GND_L01_P005" (solid, pour order 5): 510,1150 785,1150 785,875 780,880 510,880
3.3V on Top Layer "3.3V_L01_P004" (solid, remove dead copper, pour order 4): 1035,2060 1040,2055 1155,2055 1155,2030 1260,2030 1260,1820 1035,1820
NetL4_2 on Top Layer "NETL4_2_L01_P003" (solid, pour order 3): 745,2065 745,1900 995,1900 995,2065
NetF1_1 on Top Layer "NETF1_1_L01_P002" (solid, pour order 2): 360,1760 680,1760 680,1280 360,1280
3.3V on Layer 1 (split plane): 3523.46,20.1 20.35,20.1 20.35,2479.9 1310,2479.9 1310,2260 2060,2260 2060,2479.9 3523.46,2479.9
GND on Layer 2 (split plane): 3523.46,20.1 20.35,20.1 20.35,2479.9 1310,2479.9 1310,2260 2060,2260 2060,2479.9 3523.46,2479.9

## Other copper
Layer 1 (plane layer: these items are gaps in the copper):
  region: 1760,1850 1950,1850 1950,1660 1760,1660
  region: 1310,2500 1310,2260 2060,2260 2060,2500 1315,2500
Layer 2 (plane layer: these items are gaps in the copper):
  region: 1310,2500 1310,2260 2060,2260 2060,2500

## Silkscreen, mask and mechanical layers (free items; w line width, h text height)
Top Overlay:
  text "PN 16515 -100  / REV 1  /  / SBC to MC2 INT BRD  /  / Romtech" at 3475,635 h100 r90
Mechanical 1:
  circle w0.5: c3031.75,2303.15 r64.96
  circle w0.5: c3031.75,196.85 r64.96
  circle w0.5: c512.06,196.85 r64.96
  circle w0.5: c512.06,2303.15 r64.96
  lines w0.5: 0.25,0 0.25,2500 3543.56,2500 3543.56,0 0.25,0
Board_Outline:
  the board outline again, w5

## Text inside footprints (layer, text, board x,y; h text height)
A1: Mechanical 16 "Board Edge" at 1807,2507.84 h50; Mechanical 16 "Ground Plane" at 1827,2259.35 h50